# Altium PCB DIFF_TFT.PcbDoc
Units mil, origin at the board's own origin, x right, y up, seen from the top; angles counter-clockwise.
Board outline 2052 x 1575 mil, 2 copper layers (Top Layer, Bottom Layer); 30 components, 25 nets, 116 pads, 16 vias.
Unrouted connection lines stored in the file: 2.
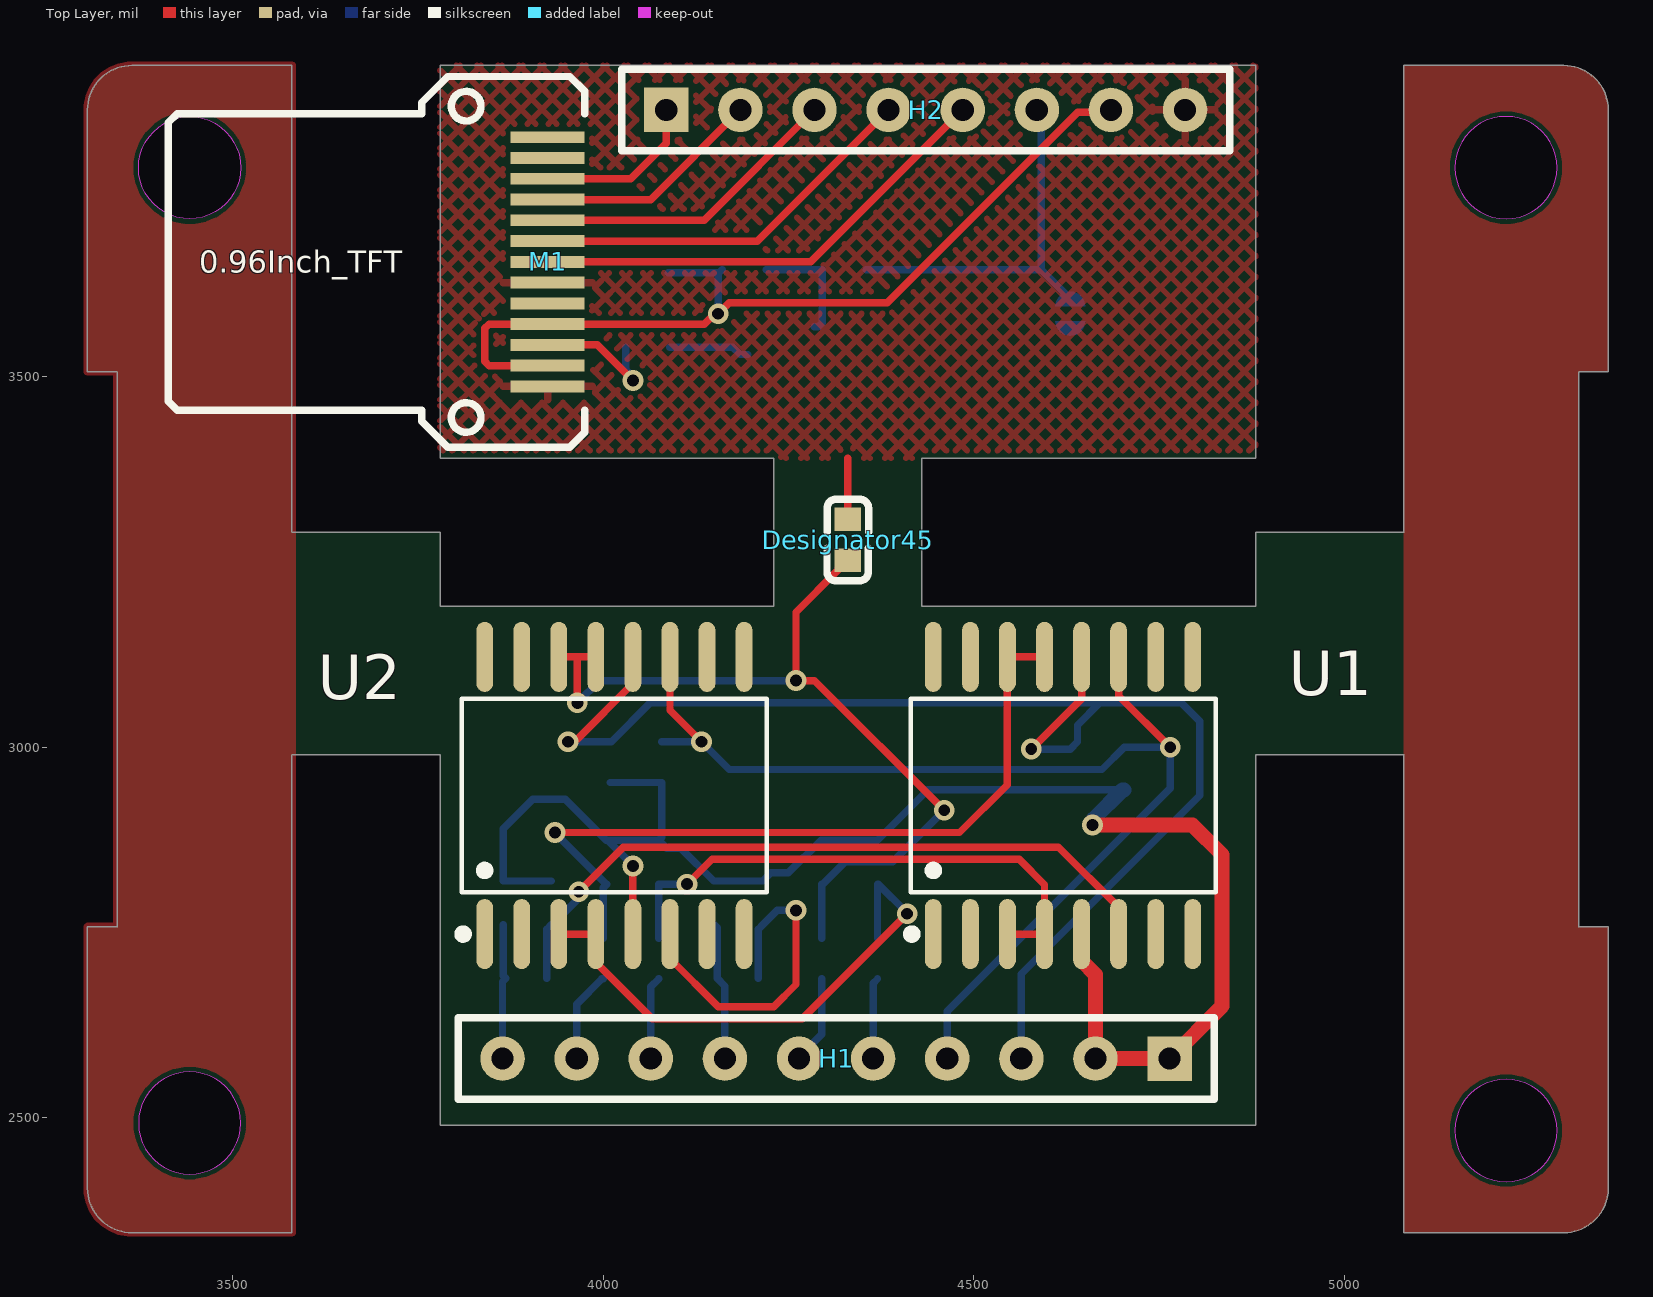
[diagram p0: Top Layer view]
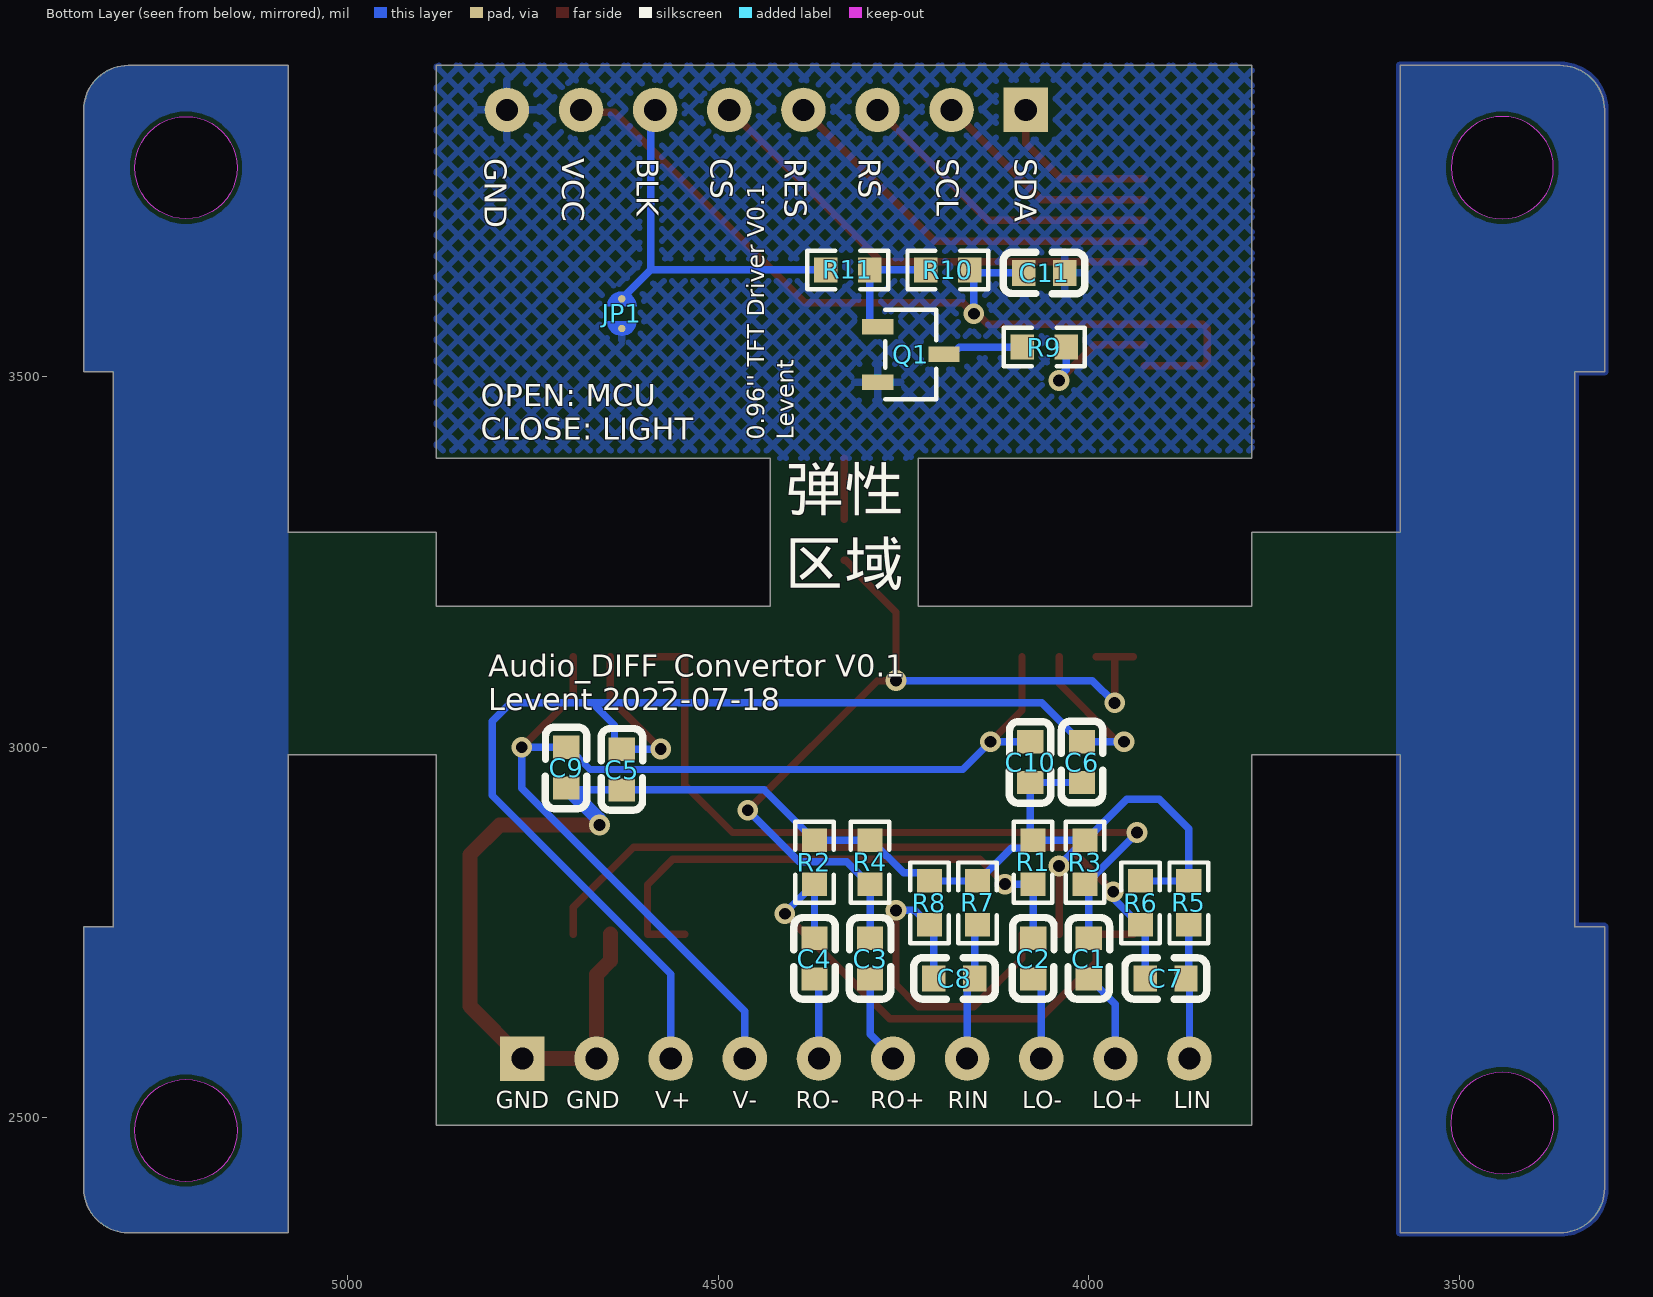
[diagram p1: Bottom Layer view, seen from below]
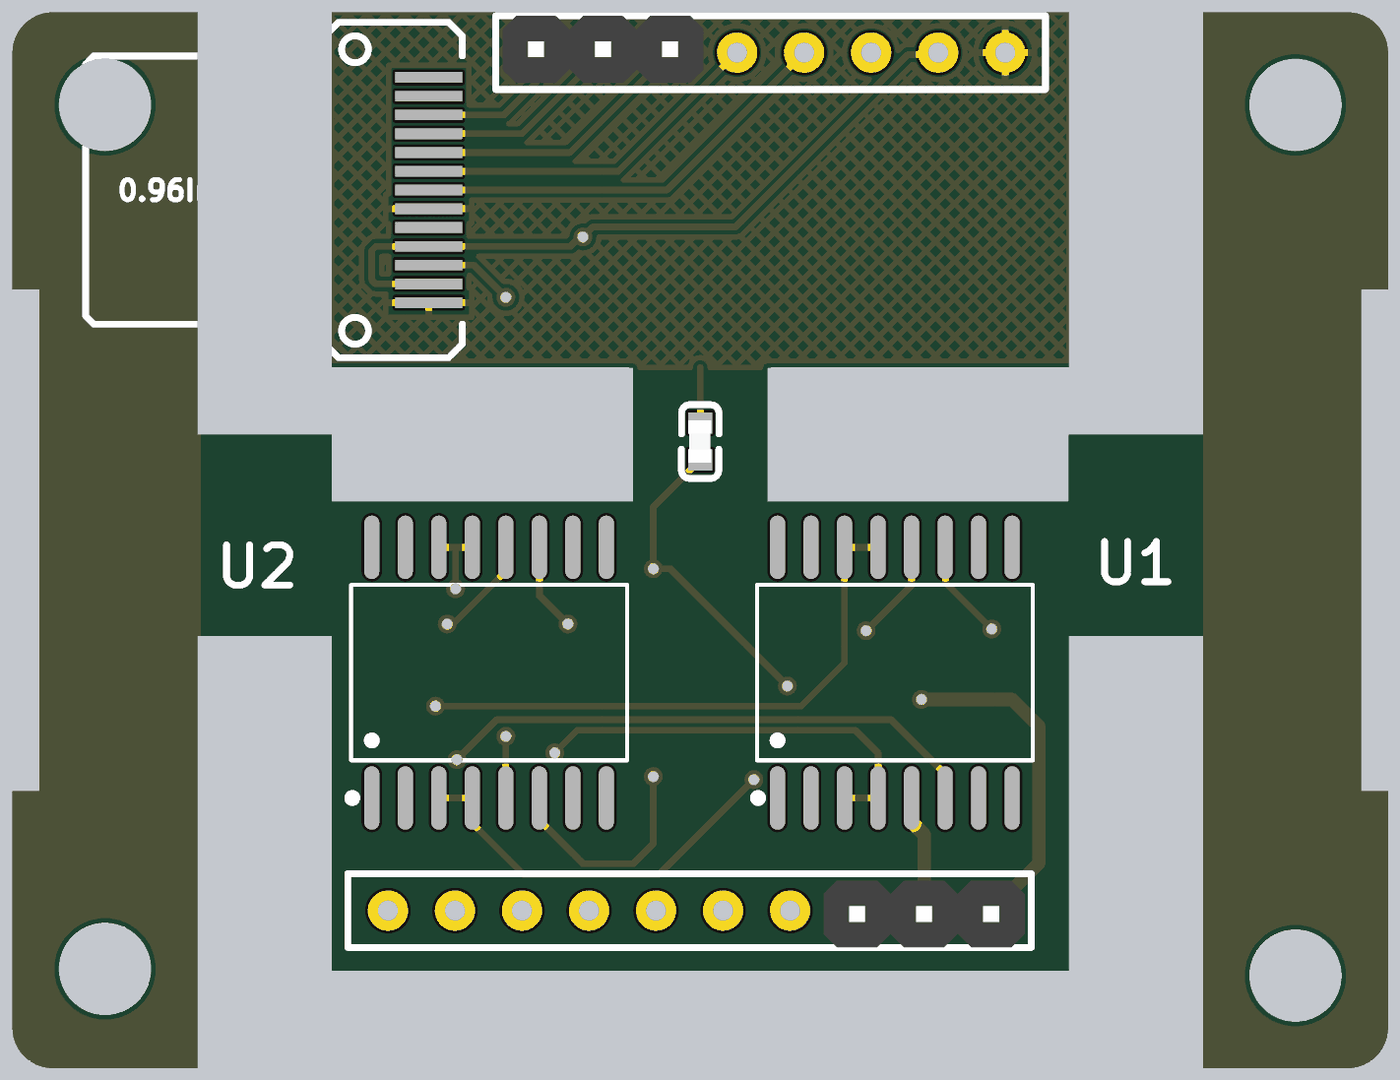
[diagram p2: 3D render of the assembled board from above, using the file's embedded part models]
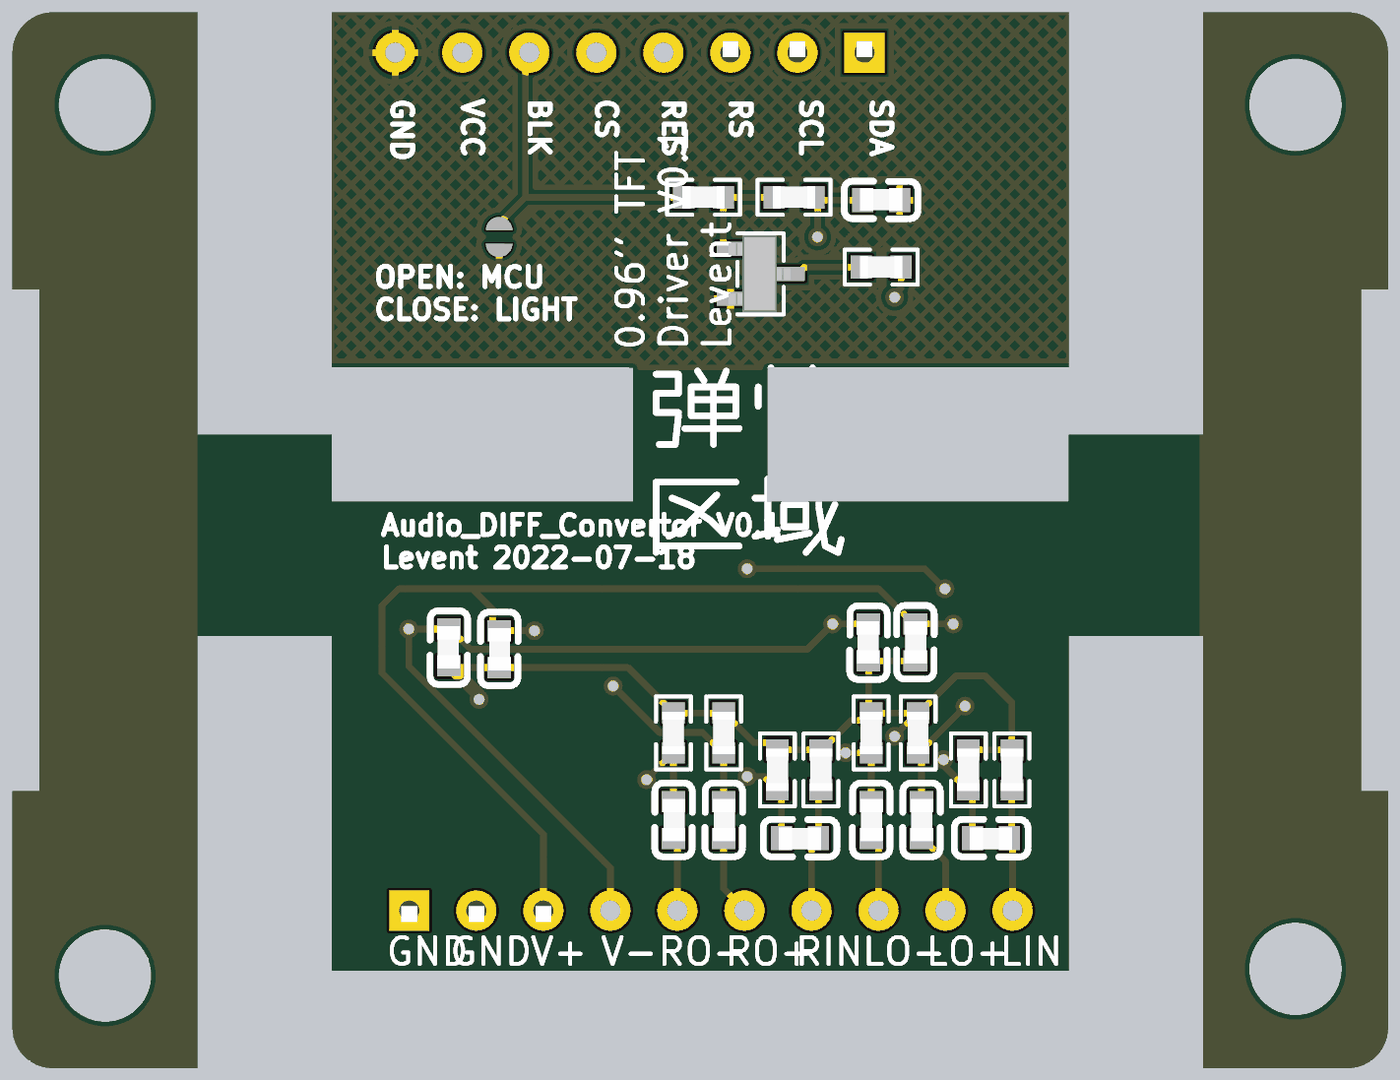
[diagram p3: 3D render of the assembled board from below, using the file's embedded part models]

## Layer stack, top to bottom
Top Solder: solder mask 0.4, Solder Resist, Dk 3.5
Top Layer: signal copper 1.4
Dielectric 1: dielectric 12.6, FR-4, Dk 4.8
Bottom Layer: signal copper 1.4
Bottom Solder: solder mask 0.4, Solder Resist, Dk 3.5

## Board outline
3304,2405 ccw(c3364,2405) 3364,2345 3580,2345 3580,2990 3780,2990 3780,2490 4880,2490 4880,2990 5080,2990 5080,2345 5296,2345 ccw(c5296,2405) 5356,2405 5356,2758 5316,2758 5316,3507 5356,3507 5356,3860 ccw(c5296,3860) 5296,3920 5080,3920 5080,3290 4880,3290 4880,3190 4430,3190 4430,3390 4880,3390 4880,3920 3780,3920 3780,3390 4230,3390 4230,3190 3780,3190 3780,3290 3580,3290 3580,3920 3364,3920 ccw(c3364,3860) 3304,3860 3304,3507 3344,3507 3344,2758 3304,2758
cut-out: 3373,2493 ccw(c3442,2493) 3442,2424 ccw(c3442,2493) 3511,2493 ccw(c3442,2493) 3442,2562 ccw(c3442,2493)
cut-out: 3442,3713 cw(c3442,3782) 3373,3782 cw(c3442,3782) 3442,3851 cw(c3442,3782) 3511,3782 cw(c3442,3782)
cut-out: 5149,2483 ccw(c5218,2483) 5218,2414 ccw(c5218,2483) 5287,2483 ccw(c5218,2483) 5218,2552 ccw(c5218,2483)
cut-out: 5149,3782 ccw(c5218,3782) 5218,3713 ccw(c5218,3782) 5287,3782 ccw(c5218,3782) 5218,3851 ccw(c5218,3782)
cut-out: 3442,3713 cw(c3442,3782) 3373,3782 cw(c3442,3782) 3442,3851 cw(c3442,3782) 3511,3782 cw(c3442,3782)
cut-out: 3373,2493 ccw(c3442,2493) 3442,2424 ccw(c3442,2493) 3511,2493 ccw(c3442,2493) 3442,2562 ccw(c3442,2493)
cut-out: 5149,3782 ccw(c5218,3782) 5218,3713 ccw(c5218,3782) 5287,3782 ccw(c5218,3782) 5218,3851 ccw(c5218,3782)
cut-out: 5149,2483 ccw(c5218,2483) 5218,2414 ccw(c5218,2483) 5287,2483 ccw(c5218,2483) 5218,2552 ccw(c5218,2483)

## Design rules (kind name [scope] priority, off if disabled: settings)
Clearance [All] p1: gap=6 ignorepadtopadclearanceinfootprint=FALSE
HoleToHoleClearance [All] p1: gap=6 allowstackedmicrovias=TRUE
MinimumSolderMaskSliver [All] p1: minsoldermaskwidth=4
PolygonConnect [All] p1: connectstyle=Relief reliefconductorwidth=10 reliefentries=4 polygonreliefangle="90 Angle" airgapwidth=10
RoutingVias [All] p1: holewidth=16 width=28 viastyle="Through Hole" minholewidth=16 minwidth=28 maxholewidth=50 maxwidth=100
SilkToSilkClearance [All] p1: silktosilkclearance=4
SilkToSolderMaskClearance [IsPad] p1: minsilkscreentomaskgap=4 clearancetoexposedcopper=TRUE
SolderMaskExpansion [All] p1: expansion=4 istentingtop=FALSE
Width [All] p1: maxlimit=100 minlimit=6 preferedwidth=10
26 further rules are at their usual default settings.

## Classes and differential pairs
component class TFT: C11 H2 JP1 M1 Q1 R9 R10 R11

## Components (designator, comment, footprint, x,y, rotation, side; value= is the part's Value field where it differs from the comment)
C1 "CAP" C0603 4000,2715 r270 bottom value=10uF
C2 "CAP" C0603 4075,2715 r270 bottom value=10uF
C3 "CAP" C0603 4295,2715 r270 bottom value=10uF
C4 "CAP" C0603 4370,2715 r270 bottom value=10uF
C5 "CAP" C0603 4630,2970 r270 bottom value=1uF
C6 "CAP" C0603 4009.16,2980 r270 bottom value=1uF
C7 "CAP" C0603 3896.33,2688.17 r0 bottom value=1uF
C8 "CAP" C0603 4181.33,2688.17 r0 bottom value=1uF
C9 "CAP" C0603 4705,2972.55 r90 bottom value=1uF
C10 "CAP" C0603 4078.95,2980 r90 bottom value=1uF
C11 "CAP" C0603 4060,3640 r180 bottom value=1uF
Designator45 "Comment" C0603 4330,3280 r90 top
H1 "Header_P10" ?#1 4414.07,2580 r180 top
H2 "Header_P8" ?#2 4435,3860 r0 top
JP1 "JP_2" JP_2Pin 4630,3585 r0 bottom
M1 "TFT_0.96_13Pin" TFT_0.96_13Pin 3925,3655 r0 top
Q1 "SS8050" SOT-23-3 4240,3530 r0 bottom
R1 "Reg" R0603 4075,2845 r90 bottom value=5K
R2 "Reg" R0603 4370,2845 r90 bottom value=5K
R3 "Reg" R0603 4005,2845 r270 bottom value=5K
R4 "Reg" R0603 4295,2845 r270 bottom value=5K
R5 "Reg" R0603 3865,2790 r270 bottom value=10K
R6 "Reg" R0603 3930,2790 r270 bottom value=10K
R7 "Reg" R0603 4150,2790 r270 bottom value=10K
R8 "Reg" R0603 4215,2790 r270 bottom value=10K
R9 "Reg" R0603 4060,3540 r180 bottom value=1K
R10 "Reg" R0603 4190,3644.16 r180 bottom value=10K
R11 "Reg" R0603 4325,3644.16 r180 bottom value=1K
U1 "DRV134UA" SOIC-16_9.5mm 4620.32,2935 r0 top
U2 "DRV134UA" SOIC-16_9.5mm 4015,2935 r0 top

## Footprints (in the part's own frame and the unit in brackets; to place one, negate y for a bottom-side part, rotate by r counter-clockwise, add the part's x,y. Pads: shape width x height; smd on the part's side, far side on the other; paste and mask are expansions set on the pad)
C0603 [mm]
  rect 0.8x0.9 smd: 1(-0.7,0) 2(0.7,0)
  silkscreen extent -1.41,-0.71 1.39,0.72, body extent -0.8,-0.41 0.8,0.45, height 0.89
JP_2Pin [mil] "2Pin跳线焊盘"
  round 10 smd: 1(0,20) 2(0,-20)
  Top Layer region: -20,10 -18.02,18.68 -12.47,25.64 -4.45,29.5 4.45,29.5 12.47,25.64 18.02,18.68 20,10 20,10
  Top Layer region: 20,-10 18.02,-18.68 12.47,-25.64 4.45,-29.5 -4.45,-29.5 -12.47,-25.64 -18.02,-18.68 -20,-10 -20,-10
R0603 [mil]
  rect 31.75x34.02 smd: 1(-29.66,0) 2(29.66,0)
  silkscreen extent -55,-26 55,26, body extent -31,-17 32,17, height 19
SOIC-16_9.5mm [mil]
  oval 22.6x94.51 smd: 1(-175,-187.02) 2(-125,-187.02) 3(-75,-187.02) 4(-25,-187.02) 5(25,-187.02) 6(75,-187.02) 7(125,-187.02) 8(175,-187.02) 9(175,187.02) 10(125,187.02) 11(75,187.02) 12(25,187.02) 13(-25,187.02) 14(-75,187.02) 15(-125,187.02) 16(-175,187.02)
  silkscreen extent -210,-193 206,131
SOT-23-3 [mm] "SOT-23-3"
  rect 1.07x0.532 smd: 1(1.135,-0.95) 2(1.135,0.95) 3(-1.135,0)
  silkscreen extent -0.88,-1.54 0.88,1.54, body extent -1.14,-1.46 1.2,1.46, height 1.08
TFT_0.96_13Pin [mil]
  rect 100x16 smd: 1(0,168) 2(0,140) 3(0,112) 4(0,84) 5(0,56) 6(0,28) 7(0,0) 8(0,-28) 9(0,-56) 10(0,-84) 11(0,-112) 12(0,-140) 13(0,-168)
  silkscreen extent -512,-250 50,250
?#1 [mil]
  rect 60x60 hole 30: 1(-350,0)
  round 60 hole 30: 2(-250,0) 3(-150,0) 4(-50,0) 4(-50,0) 5(50,0) 6(150,0) 7(250,0) 8(350,0) 9(450,0) 10(550,0)
  silkscreen extent -410,-55 610,55, body extent -400,-45 -100,55, height 315
?#2 [mil]
  rect 60x60 hole 30: 1(-350,0)
  round 60 hole 30: 2(-250,0) 3(-150,0) 4(-50,0) 4(-50,0) 5(50,0) 6(150,0) 7(250,0) 8(350,0)
  silkscreen extent -410,-55 410,55, body extent -400,-45 -100,55, height 315

## Part data
C1 C2 C3 C4 C5 C6 C7 C8 C9 C10 C11: "Cap", BOM_Manufacturer="Huaxin S&T", BOM_Manufacturer Part=0603B103K101CT, BOM_Supplier=LCSC, BOM_Supplier Part=C302008, Contributor=LCSC, nameAlias=Capacitance, spicePre=C, spiceSymbolName=0603B103K101CT
H1: "Header 10Pin"
H2: "8Pin排针"
JP1: "2Pin跳线焊盘"
M1: "ST7735_TFT"
Q1: "NPN", BOM_Manufacturer=AnBon, BOM_Manufacturer Part=SS8050, BOM_Paste Type=recommend, BOM_Supplier=LCSC, BOM_Supplier Part=C541705, Contributor=LCSC, spicePre=Q, spiceSymbolName=SS8050_C541705
R1 R2 R3 R4 R5 R6 R7 R8 R9 R10 R11: library part Res, "电阻", BOM_Manufacturer="Viking Tech", BOM_Manufacturer Part=AR03BTCX1002A, BOM_Supplier=LCSC, BOM_Supplier Part=C465721, Contributor=LCSC, nameAlias="Resistance (Ohms)", spicePre=R, spiceSymbolName=AR03BTCX1002A
U1 U2: "音频差分放大器", BOM_JLCPCB Part Class="Extended Part", BOM_Manufacturer=TI(德州仪器), BOM_Manufacturer Part=DRV134UA, BOM_Supplier=LCSC, BOM_Supplier Part=C1519988, Contributor=LCSC, spicePre=U, spiceSymbolName=DRV134UA

## Via types
v1: diameter 28, hole 16, Top Layer to Bottom Layer, tented both sides, 16 vias

## Nets (pads, with @x,y where several pads share a name; then routed paths per layer and width w, separated by ;. In a path a pad name is that pad's centre, name@x,y a point inside that pad or via, vN(x,y) a via of type N, cw(c..) or ccw(c..) an arc to the next point about the centre after c; other vN are vias at no path point)
A_LIN: C7.1 H1.10 R5.2 | length 183.9
  Bottom Layer w10: H1.10 3864.07,2683.47 C7.1 3865,2691.94 R5.2
A_LOUT+: C1.2 H1.9 | length 123.5
  Bottom Layer w10: H1.9 3964.07,2653.49 3998.03,2687.45 C1.2
A_LOUT-: C2.2 H1.8 | length 112.1
  Bottom Layer w10: H1.8 4064.07,2676.7 4074.82,2687.45 C2.2
A_RIN: C8.1 H1.7 R7.2 | length 186.2
  Bottom Layer w10: R7.2 4153.77,2756.57 C8.1 4164.07,2677.86 H1.7
A_ROUT+: C3.2 H1.6 | length 120.3
  Bottom Layer w10: H1.6 4264.07,2581.79 4295,2612.71 C3.2
A_ROUT-: C4.2 H1.5 | length 109.9
  Bottom Layer w10: H1.5 4364.07,2681.52 C4.2
BLK: H2.6 JP1.2 R11.1 | length 509.8
  Bottom Layer w10: R11.1 4590.84,3644.16 ; H2.6 4590.84,3854.16 4590.84,3644.16 ; JP1.2 4590.84,3644.16
CS: H2.5 M1.7 | length 644.9
  Top Layer w10: M1.7 4280,3655 H2.5
GND: C5.2 C6.2 C9.1 C10.1 C11.2 Designator45.2 H1.1 H1.2 H2.8 JP1.1 M1.8 M1.13 Q1.2 R1.2 R2.2 R3.1 R4.1 R5.1 R6.1 R7.1 R8.1 U1.5 U2.5 | length 2297.8
  Top Layer w10: U2.5 v1(4040,2839.95) ; Designator45.2 4330,3390
  Top Layer w20: U1.5 4645.32,2712.03 4664.07,2693.27 H1.2 H1.1 4835,2650.93 4835,2855 4795,2895 v1(4660,2895)
  Bottom Layer w10: R6.1 R5.1 3865,2890 3905,2930 3948.52,2930 4003.87,2874.66 R3.1 R3.1@4006.13,2874.66 ; C6.2 C10.1 4078.95,2878.6 R1.2 ; v1(4040,2839.95) 4040,2840.79 R3.1@4006.13,2874.66 ; C9.1@4700.48,2942.45 C5.2 4437.79,2942.45 R2.2 R4.1 4293.87,2874.66 4249.74,2830.53 4225.88,2830.53 R8.1 R7.1 4148.87,2819.66 4104.74,2863.78 4085.88,2863.78 R1.2 ; C9.1@4702.44,2942.45 C9.1 ; R3.1@4006.13,2874.66 R1.2
  Bottom Layer w20: v1(4660,2895) 4661.53,2896.53 4661.53,2903.5 4700.48,2942.45 C9.1@4702.44,2942.45
LEDK: M1.11 R9.2 | length 183.9
  Top Layer w10: M1.11 3992,3543 v1(4040,3495)
  Bottom Layer w10: R9.2 4030.34,3509.17 4040,3499.52 v1(4040,3495)
NetC1_1: C1.1 R3.2 U1.13 U1.14 | length 1033.6
  Top Layer w10: v1(3935,2885) 4480.64,2885 4545.32,2949.68 U1.14 U1.13
  Bottom Layer w10: v1(3935,2885) 3935,2884.21 4003.87,2815.34 R3.2 4000,2810.34 C1.1
NetC2_1: C2.1 R1.1 U1.3 U1.4 | length 739.3
  Top Layer w10: v1(4112.99,2815.34) 4146.65,2849 4561,2849 4595.32,2814.68 U1.4 U1.3
  Bottom Layer w10: C2.1 R1.1 v1(4112.99,2815.34) v1@4112.99,2814
NetC3_1: C3.1 Designator45.1 R4.2 U2.13 U2.14 | length 1163.6
  Top Layer w10: U2.14 3965,3122.02 ; v1(3965,3060) 3965,3122.02 ; U2.13 3965,3122.02 ; Designator45.1 4328.03,3252.45 4317.28,3241.7 4317.28,3239.73 4260,3182.45 v1(4260,3090) 4285,3090 v1(4460,2915)
  Bottom Layer w10: v1(3965,3060) 3995,3090 v1(4260,3090) ; C3.1 R4.2 4296.13,2815.34 4326.4,2845.61 4390.61,2845.61 v1(4460,2915)
NetC4_1: C4.1 R2.1 U2.3 U2.4 | length 728
  Top Layer w10: U2.3 U2.4 3990,2710 4066,2634 4268.65,2634 v1(4410,2775.34)
  Bottom Layer w10: C4.1 R2.1 4371.13,2815.34 4410,2776.48 v1(4410,2775.34)
NetC7_2: C7.2 R6.2 U1.6 | length 958.2
  Top Layer w10: v1(3967.01,2805.17) 4026.83,2865 4614.26,2865 4695.32,2783.94 U1.6
  Bottom Layer w10: C7.2 3923.88,2754.23 R6.2 3931.13,2760.34 3963.56,2792.78 3963.56,2801.73 v1(3967.01,2805.17)
NetC8_2: C8.2 R8.2 U2.6 | length 470.2
  Top Layer w10: U2.6 4090,2715 4155,2650 4230,2650 4260,2680 v1(4260,2780)
  Bottom Layer w10: C8.2 4208.88,2754.23 R8.2 4234.65,2780 v1(4260,2780)
NetQ1_1: Q1.1 R10.1 R11.2 | length 159.9
  Bottom Layer w10: R10.1 R11.2 4295.35,3572.87 4289.87,3567.4 Q1.1
NetQ1_3: Q1.3 R9.1 | length 109.8
  Bottom Layer w10: R9.1 4174.72,3540 4184.72,3530 Q1.3
PWR_DC_V5+: C5.1 C6.1 H1.3 U1.12 U2.12 | length 1879.4
  Top Layer w10: v1(3952.55,3007.55) 3956,3011 3964.94,3011 4040,3086.06 U2.12 ; v1(4577.44,2997.55) 4645.32,3065.43 U1.12
  Bottom Layer w10: v1(3952.55,3007.55) C6.1 4011.13,3007.55 4063.57,3060 4670,3060 ; H1.3 4564.07,2694.07 4805,2935 4805,3035 4780,3060 4670,3060 ; v1(4577.44,2997.55) C5.1 4639.89,3007.45 4639.89,3029.89 4670,3060
PWR_DC_V5-: C9.2 C10.2 H1.4 U1.11 U2.11 | length 1541.5
  Top Layer w10: U2.11 4090,3050.11 v1(4132.56,3007.55) ; U1.11 4695.72,3121.61 4695.72,3069.28 v1(4764.89,3000.11)
  Bottom Layer w10: C10.2 v1(4132.56,3007.55) 4170.11,2970 4672.92,2970 4703.03,3000.11 C9.2 v1(4764.89,3000.11) 4764.89,2944.79 4464.07,2643.98 H1.4@4464.07,2580
RES: H2.4 M1.6 | length 533.3
  Top Layer w10: M1.6 4208,3683 H2.4@4385,3860
RS: H2.3 M1.5 | length 421.7
  Top Layer w10: M1.5 4136,3711 H2.3
SCL: H2.2 M1.4 | length 310.1
  Top Layer w10: M1.4 4064,3739 H2.2
SDA: H2.1 M1.3 | length 224.9
  Top Layer w10: M1.3 4037,3767 4085,3815 H2.1
VCC: C11.1 H2.7 M1.10 M1.12 R10.2 | length 1228.8
  Top Layer w10: M1.12 3845.86,3515 3840,3520.86 3840,3565.14 3845.86,3571 M1.10 4136.13,3571 4150.13,3585 v1(4155,3585) 4170,3600 4382.98,3600 4640,3857.02 4682.02,3857.02 H2.7
  Bottom Layer w10: C11.1 R10.2@4156.19,3640 ; v1(4155,3585) 4155,3638.81 R10.2@4156.19,3640 ; R10.2 R10.2@4156.19,3640
pads on no net: M1.1 M1.2 M1.9 U1.1 U1.2 U1.7 U1.8 U1.9 U1.10 U1.15 U1.16 U2.1 U2.2 U2.7 U2.8 U2.9 U2.10 U2.15 U2.16

## Polygon pours and split planes (outlines as drawn)
no net on Top Layer "NONET_L-01_P-001" (solid, pour order 5): 3298.99,2405 3298.99,2758 cw(c3304,2758) 3304,2763.01 3338.99,2763.01 3338.99,3501.99 3304,3501.99 cw(c3304,3507) 3298.99,3507 3298.99,3860 cw(c3364,3860) 3364,3925.01 3580,3925.01 cw(c3580,3920) 3585.01,3920 3585.01,2345 cw(c3580,2345) 3580,2339.99 3364,2339.99 cw(c3364,2405)
no net on Top Layer "NONET_L-01_P-001" (solid, pour order 3): 5080,2345 5080,3920 5296,3920 cw(c5296,3860) 5356,3860 5356,3507 5316,3507 5316,2758 5356,2758 5356,2405 cw(c5296,2405) 5296,2345
GND on Top Layer "NONET_L-01_P-001" (hatched 45Degree grid 20 track 8, pour order 1): 3780,3920 4880,3920 4880,3390 3780,3390
no net on Bottom Layer "NONET_L-01_P-001" (solid, pour order 4): 3298.99,2405 3298.99,2758 cw(c3304,2758) 3304,2763.01 3338.99,2763.01 3338.99,3501.99 3304,3501.99 cw(c3304,3507) 3298.99,3507 3298.99,3860 cw(c3364,3860) 3364,3925.01 3580,3925.01 cw(c3580,3920) 3585.01,3920 3585.01,2345 cw(c3580,2345) 3580,2339.99 3364,2339.99 cw(c3364,2405)
no net on Bottom Layer "NONET_L-01_P-001" (solid, pour order 2): 5080,2345 5080,3920 5296,3920 cw(c5296,3860) 5356,3860 5356,3507 5316,3507 5316,2758 5356,2758 5356,2405 cw(c5296,2405) 5296,2345
GND on Bottom Layer "NONET_L-01_P-001" (hatched 45Degree grid 20 track 8, pour order 0): 3780,3920 4880,3920 4880,3390 3780,3390

## Silkscreen, mask and mechanical layers (free items; w line width, h text height)
Bottom Overlay:
  text "SDA" at 4100,3795 h30 r90
  text "SCL" at 4205,3795 h30 r90
  text "RS" at 4310,3795 h30 r90
  text "RES" at 4410,3795 h30 r90
  text "CS" at 4510,3795 h30 r90
  text "BLK" at 4610,3795 h30 r90
  text "VCC" at 4710,3795 h30 r90
  text "GND" at 4815,3795 h30 r90
  text "0.96'' TFT Driver V0.1 / Levent" at 4390,3415 h40 r270
  text "OPEN: MCU / CLOSE: LIGHT" at 4820,3415 h30
  text "弹性 / 区域" at 4410,3200 h100
  text "Audio_DIFF_Convertor V0.1 / Levent 2022-07-18" at 4810,3050 h30
  text "LIN" at 3885,2505 h40
  text "LO+" at 3995,2505 h40
  text "LO-" at 4090,2505 h40
  text "RIN" at 4190,2505 h40
  text "RO+" at 4295,2505 h40
  text "RO-" at 4395,2505 h40
  text "V-" at 4480,2505 h40
  text "V+" at 4585,2505 h40
  text "GND" at 4705,2505 h40
  text "GND" at 4800,2505 h40
Mechanical 1:
  circle w10: c3442,3782 r69
  circle w10: c3442,2493 r69
  circle w10: c3442,2493 r69
  circle w10: c3442,3782 r69
  circle w10: c5218,3782 r69
  circle w10: c5218,2483 r69
  lines w10: 3304,2405 ccw(c3364,2405) 3364,2345 ; 3304,2405 ccw(c3364,2405) 3364,2345 ; 3304,2405 3304,2758 ; 3304,2405 3304,2758 ; 3304,2758 3344,2758 ; 3304,2758 3344,2758 ; 3304,3507 3344,3507 ; 3304,3507 3304,3860 ; 3304,3507 3304,3860 ; 3304,3507 3344,3507 ; 3304,3860 cw(c3364,3860) 3364,3920 ; 3304,3860 cw(c3364,3860) 3364,3920 ; 3344,2758 3344,3507 ; 3344,2758 3344,3507 ; 3364,2345 3580,2345 ; 3364,2345 3580,2345 ; 3364,3920 3580,3920 ; 3364,3920 3580,3920 ; 3580,2345 3580,2990 3780,2990 3780,2490 4880,2490 4880,2990 5080,2990 5080,2345 5296,2345 ccw(c5296,2405) 5356,2405 5356,2758 5316,2758 5316,3507 5356,3507 5356,3860 ccw(c5296,3860) 5296,3920 5080,3920 5080,3290 4880,3290 4880,3190 4430,3190 4430,3390 4880,3390 4880,3920 3780,3920 3780,3390 4230,3390 4230,3190 3780,3190 3780,3290 3580,3290 3580,3920

## Text inside footprints (layer, text, board x,y; h text height)
M1: Top Overlay "0.96Inch_TFT" at 3455,3640 h30